# Altium PCB imp_match_v1.PcbDoc
Units mil, origin at the board's own origin, x right, y up, seen from the top; angles counter-clockwise.
Board outline 3000 x 1600 mil, 4 copper layers (Top Layer, Layer 1, Layer 2, Bottom Layer), stack 63.779 mil thick; 4 components, 3 nets, 20 pads, 169 vias.
Unrouted connection lines stored in the file: 4.
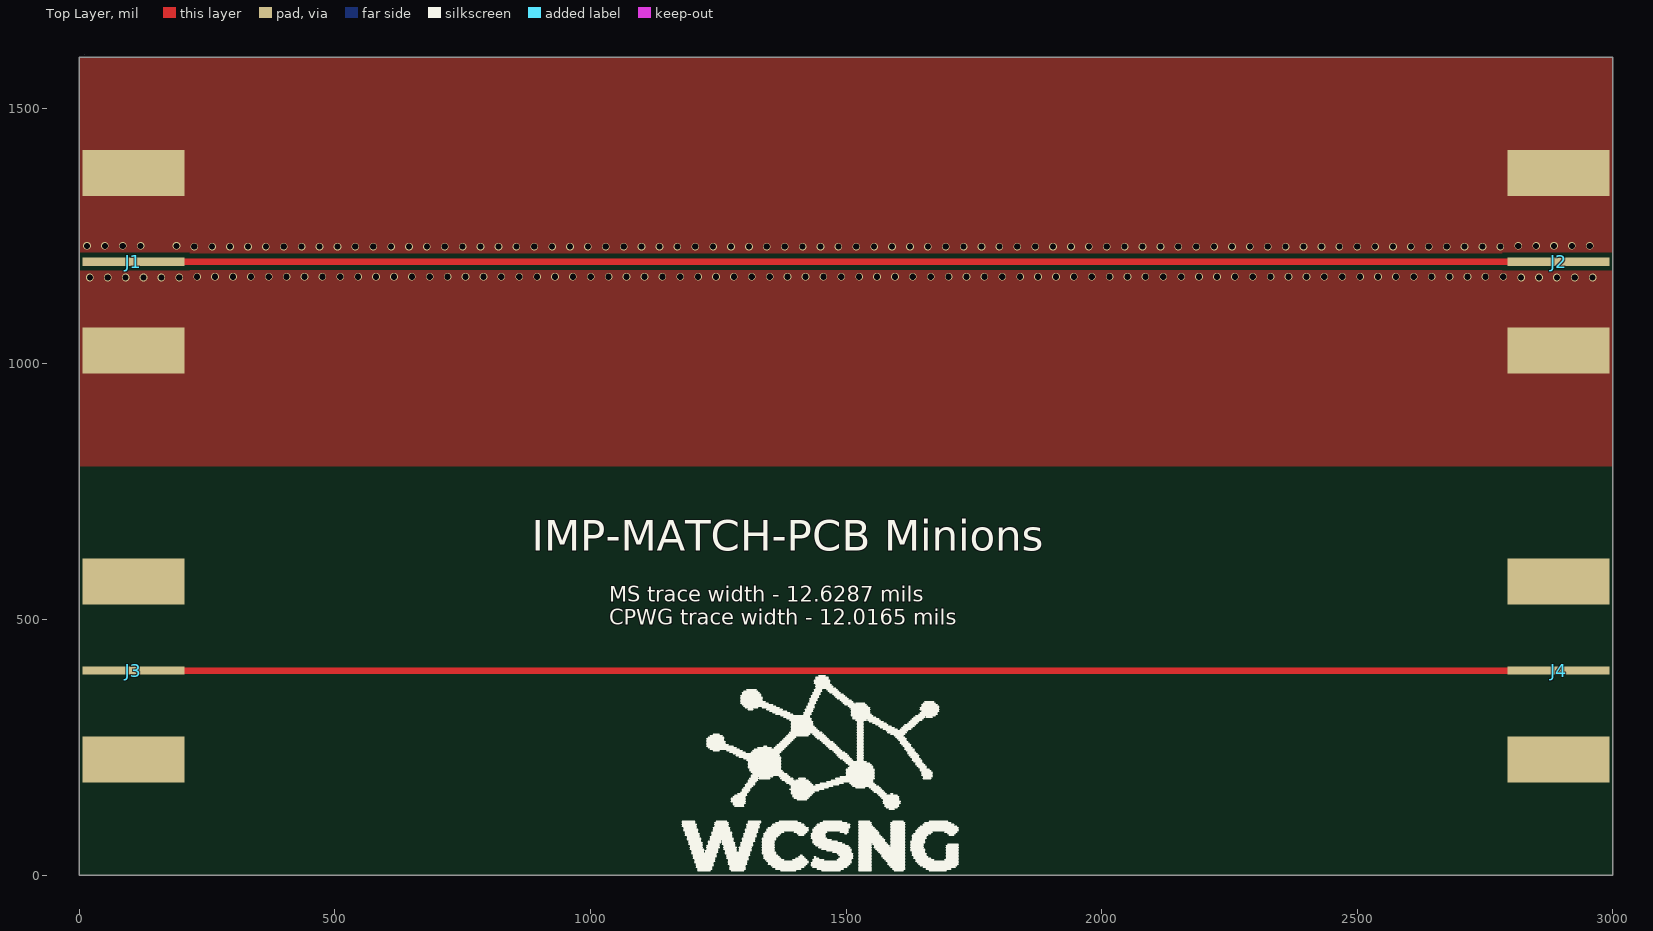
[diagram p0: Top Layer view]
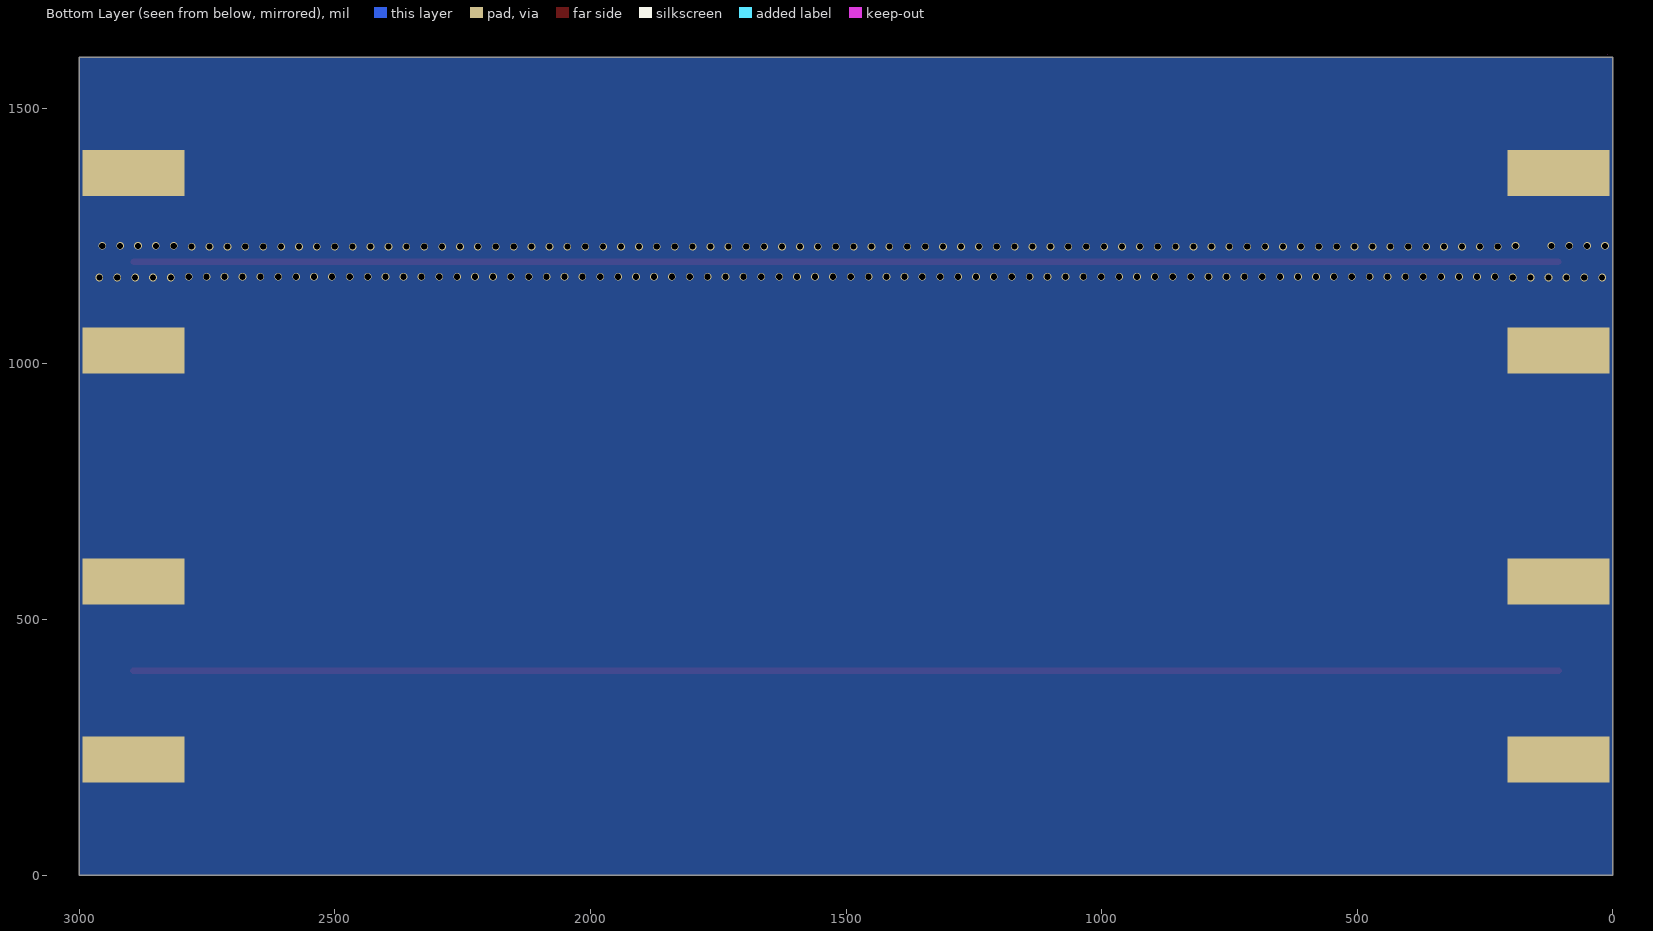
[diagram p1: Bottom Layer view, seen from below]
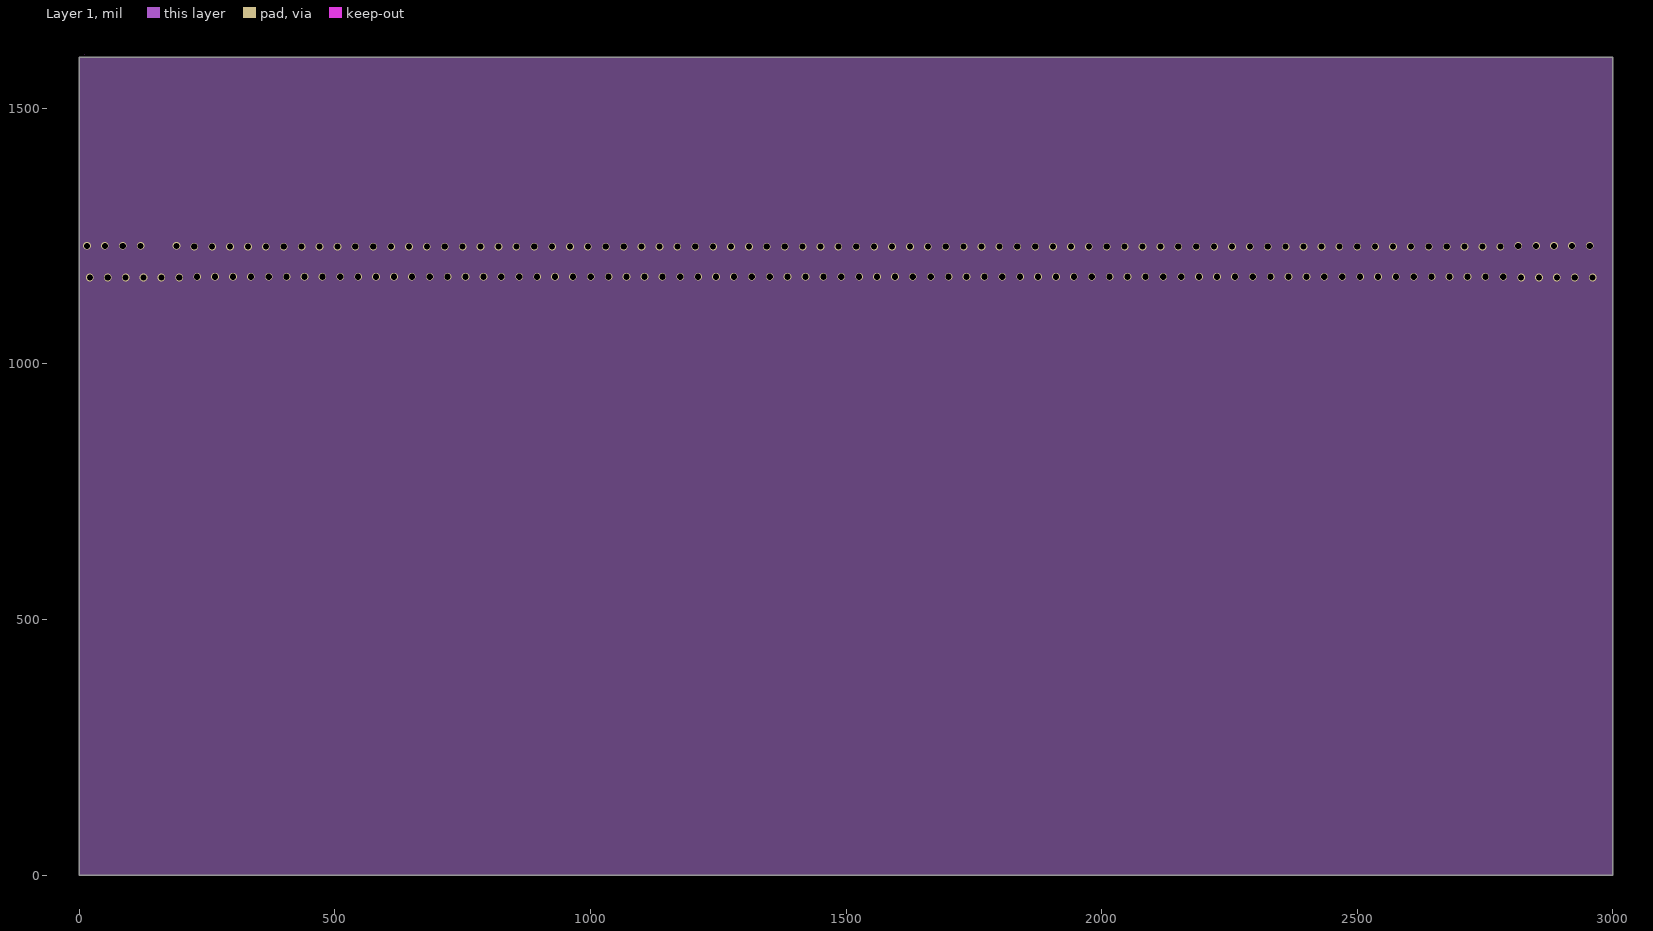
[diagram p2: Layer 1]
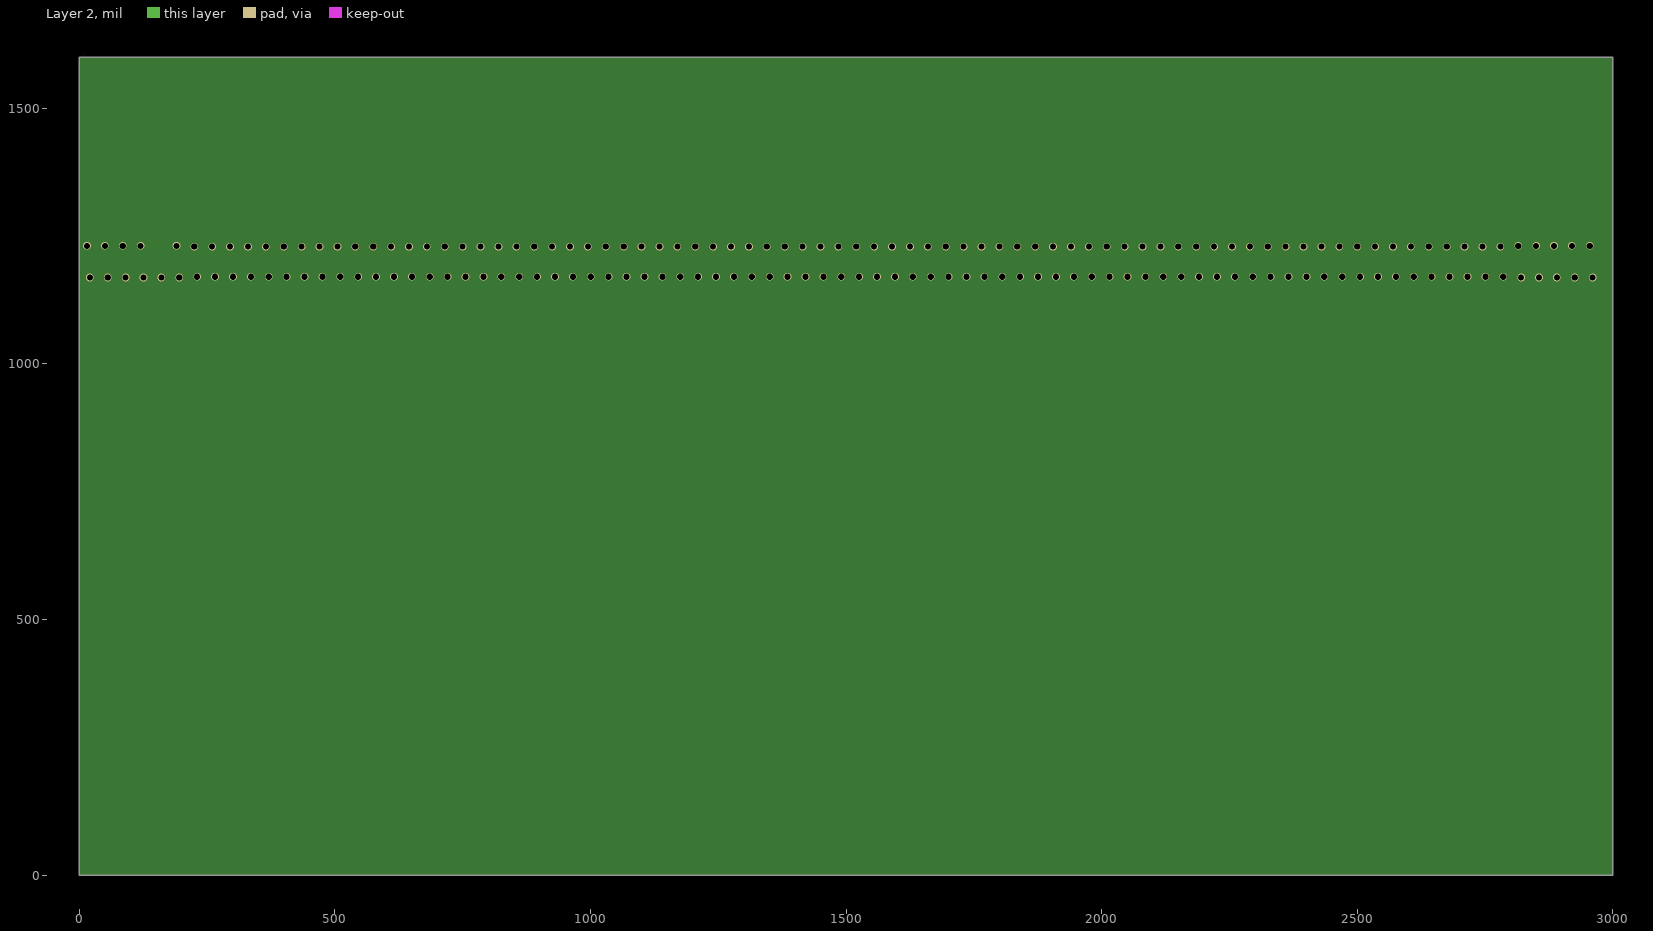
[diagram p3: Layer 2]

## Layer stack, top to bottom
Top Solder: solder mask 0.4, Solder Resist, Dk 3.5
Top Layer: signal copper 1.3779
Prepreg - Top: prepreg 6.8898, 7628AT05, Dk 4.2
Layer 1: signal copper 1.3779
Core: dielectric 44.4882, FR-4 7628, Dk 4.2
Layer 2: signal copper 1.3779
Prepreg - Bottom: prepreg 6.8898, 7628AT05, Dk 4.2
Bottom Layer: signal copper 1.3779
Bottom Solder: solder mask 0.4, Solder Resist, Dk 3.5

## Board outline
0,0 3000,0 3000,1600 0,1600
cut-out: 10,1605

## Design rules (kind name [scope] priority, off if disabled: settings)
Clearance "Schematic Clearance Constraint" [InNet('RF1')] p1: gap=10 ignorepadtopadclearanceinfootprint=FALSE except(0: Arc-Hole Track-Hole SMDPad-Hole THPad-Hole Via-Hole Fill-Hole Poly-Hole Region-Hole Text-Hole)
Clearance [All] p2: gap=10 ignorepadtopadclearanceinfootprint=FALSE except(0: Arc-Hole Track-Hole SMDPad-Hole THPad-Hole Via-Hole Fill-Hole Poly-Hole Region-Hole Text-Hole)
PlaneConnect [All] p1: planeconnectstyle=Direct reliefexpansion=20 reliefentries=4 reliefconductorwidth=10 reliefairgap=10
PolygonConnect [All] p1: connectstyle=Direct reliefconductorwidth=10 reliefentries=4 polygonreliefangle="90 Angle" airgapwidth=10
RoutingVias [All] p1: holewidth=12 width=15 viastyle="Through Hole" minholewidth=12 minwidth=15 maxholewidth=20 maxwidth=20
SolderMaskExpansion [All] p1: expansion=4
Width "Schematic Width Constraint" [InNet('RF2')] p1: maxlimit=12.63 minlimit=12.63 preferedwidth=12.63 midlayer1_minwidth=12.63 midlayer2_minwidth=12.63 bottomlayer_minwidth=12.63 minimp=50.000000 maximp=50.000000 favimp=50.000000
Width "Schematic Width Constraint_1" [InNet('RF1')] p2: maxlimit=12.02 minlimit=12.02 preferedwidth=12.02 minimp=50.000000 maximp=50.000000 favimp=50.000000
Width [All] p3: maxlimit=10 minlimit=10 preferedwidth=10
29 further rules are at their usual default settings.

## Components (designator, comment, footprint, x,y, rotation, side; value= is the part's Value field where it differs from the comment)
J1 "SMA 50 Ohm edge" SMA-OSHPARK-4L-1.6MM 5,1200 r0 top
J2 "SMA 50 Ohm edge" SMA-OSHPARK-4L-1.6MM 2995,1200 r180 top
J3 "SMA 50 Ohm edge" SMA-OSHPARK-4L-1.6MM 5,400 r0 top
J4 "SMA 50 Ohm edge" SMA-OSHPARK-4L-1.6MM 2995,400 r180 top

## Footprints (in the part's own frame and the unit in brackets; to place one, negate y for a bottom-side part, rotate by r counter-clockwise, add the part's x,y. Pads: shape width x height; smd on the part's side, far side on the other; paste and mask are expansions set on the pad)
SMA-OSHPARK-4L-1.6MM [mil]
  rect 200x90 smd: GND(101,-174) GND(101,174)
  rect 200x90 smd far side: GND(101,-174) GND(101,174)
  rect 200x16 smd: SIG(101,0)

## Part data
J1 J2 J3 J4: library part SMA-OSHPARK-4L-1.6MM, DeviceName=-OSHPARK-4L-1.6MM, DeviceSetName=SMA, GateName_1=G1, LibraryName=dword1511-connectors, Package=SMA-OSHPARK-4L-1.6MM, SymbolName_1=COAX

## Via types
v1: diameter 15, hole 12, Top Layer to Bottom Layer, 169 vias

## Nets (pads, with @x,y where several pads share a name; then routed paths per layer and width w, separated by ;. In a path a pad name is that pad's centre, name@x,y a point inside that pad or via, vN(x,y) a via of type N, cw(c..) or ccw(c..) an arc to the next point about the centre after c; other vN are vias at no path point)
GND: J1.GND J2.GND J3.GND J4.GND
  other v1: 20.74,1169.06 55.74,1169.06 90.74,1169.06 125.74,1169.06 160.74,1169.06 195.74,1169.06 2820.67,1169.06 2855.67,1169.06 2890.67,1169.06 2925.67,1169.06 2960.67,1169.06 230.7,1170.56 265.7,1170.56 300.7,1170.56 335.7,1170.56 370.7,1170.56 405.7,1170.56 440.7,1170.56 475.7,1170.56 510.7,1170.56 545.7,1170.56 580.7,1170.56 615.7,1170.56 650.7,1170.56 685.7,1170.56 720.7,1170.56 755.7,1170.56 790.7,1170.56 825.7,1170.56 860.7,1170.56 895.7,1170.56 930.7,1170.56 965.7,1170.56 1000.7,1170.56 1035.7,1170.56 1070.7,1170.56 1105.7,1170.56 1140.7,1170.56 1175.7,1170.56 1210.7,1170.56 1245.7,1170.56 1280.7,1170.56 1315.7,1170.56 1350.7,1170.56 1385.7,1170.56 1420.7,1170.56 1455.7,1170.56 1490.7,1170.56 1525.7,1170.56 1560.7,1170.56 1595.7,1170.56 1630.7,1170.56 1665.7,1170.56 1700.7,1170.56 1735.7,1170.56 1770.7,1170.56 1805.7,1170.56 1840.7,1170.56 1875.7,1170.56 1910.7,1170.56 1945.7,1170.56 1980.7,1170.56 2015.7,1170.56 2050.7,1170.56 2085.7,1170.56 2120.7,1170.56 2155.7,1170.56 2190.7,1170.56 2225.7,1170.56 2260.7,1170.56 2295.7,1170.56 2330.7,1170.56 2365.7,1170.56 2400.7,1170.56 2435.7,1170.56 2470.7,1170.56 2505.7,1170.56 2540.7,1170.56 2575.7,1170.56 2610.7,1170.56 2645.7,1170.56 2680.7,1170.56 2715.7,1170.56 2750.7,1170.56 2785.7,1170.56 225.09,1229.44 260.09,1229.44 295.09,1229.44 330.09,1229.44 365.09,1229.44 400.09,1229.44 435.09,1229.44 470.09,1229.44 505.09,1229.44 540.09,1229.44 575.09,1229.44 610.09,1229.44 645.09,1229.44 680.09,1229.44 715.09,1229.44 750.09,1229.44 785.09,1229.44 820.09,1229.44 855.09,1229.44 890.09,1229.44 925.09,1229.44 960.09,1229.44 995.09,1229.44 1030.09,1229.44 1065.09,1229.44 1100.09,1229.44 1135.09,1229.44 1170.09,1229.44 1205.09,1229.44 1240.09,1229.44 1275.09,1229.44 1310.09,1229.44 1345.09,1229.44 1380.09,1229.44 1415.09,1229.44 1450.09,1229.44 1485.09,1229.44 1520.09,1229.44 1555.09,1229.44 1590.09,1229.44 1625.09,1229.44 1660.09,1229.44 1695.09,1229.44 1730.09,1229.44 1765.09,1229.44 1800.09,1229.44 1835.09,1229.44 1870.09,1229.44 1905.09,1229.44 1940.09,1229.44 1975.09,1229.44 2010.09,1229.44 2045.09,1229.44 2080.09,1229.44 2115.09,1229.44 2150.09,1229.44 2185.09,1229.44 2220.09,1229.44 2255.09,1229.44 2290.09,1229.44 2325.09,1229.44 2360.09,1229.44 2395.09,1229.44 2430.09,1229.44 2465.09,1229.44 2500.09,1229.44 2535.09,1229.44 2570.09,1229.44 2605.09,1229.44 2640.09,1229.44 2675.09,1229.44 2710.09,1229.44 2745.09,1229.44 2780.09,1229.44 15.13,1230.94 50.13,1230.94 85.13,1230.94 120.13,1230.94 190.13,1230.94 2815.06,1230.94 2850.06,1230.94 2885.06,1230.94 2920.06,1230.94 2955.06,1230.94
RF1: J1.SIG J2.SIG | length 2788
  Top Layer w12.02: J1.SIG J2.SIG
RF2: J3.SIG J4.SIG | length 2788
  Top Layer w12.63: J3.SIG J4.SIG

## Polygon pours and split planes (outlines as drawn)
GND on Top Layer "GND-Top" (solid, pour order 4): 0,1600 3000,1600 3000,800 0,800
GND on Bottom Layer "GND-Bottom" (solid, pour order 5): 0,1600 3000,1600 3000,0 0,0
GND on Layer 2 "Layer2-GND" (solid, pour order 6): 0,1600 3000,1600 3000,0 0,0
GND on Layer 1 "Layer 1-GND" (solid, pour order 7): 0,1600 3000,1600 3000,0 0,0

## Silkscreen, mask and mechanical layers (free items; w line width, h text height)
Top Overlay:
  drawing of 588 lines, arcs and shapes, not listed
  text "IMP-MATCH-PCB Minions" at 885,635 h60
  text "MS trace width - 12.6287 mils / CPWG trace width - 12.0165 mils" at 1036.63,490 h30
Top Solder:
  lines w13: 95,400 2795,400 ; 190,1200 2880,1200
Mechanical 1:
  the board outline again, w20